# EAGLE board domino_IPB (EAGLE 9.6.2)
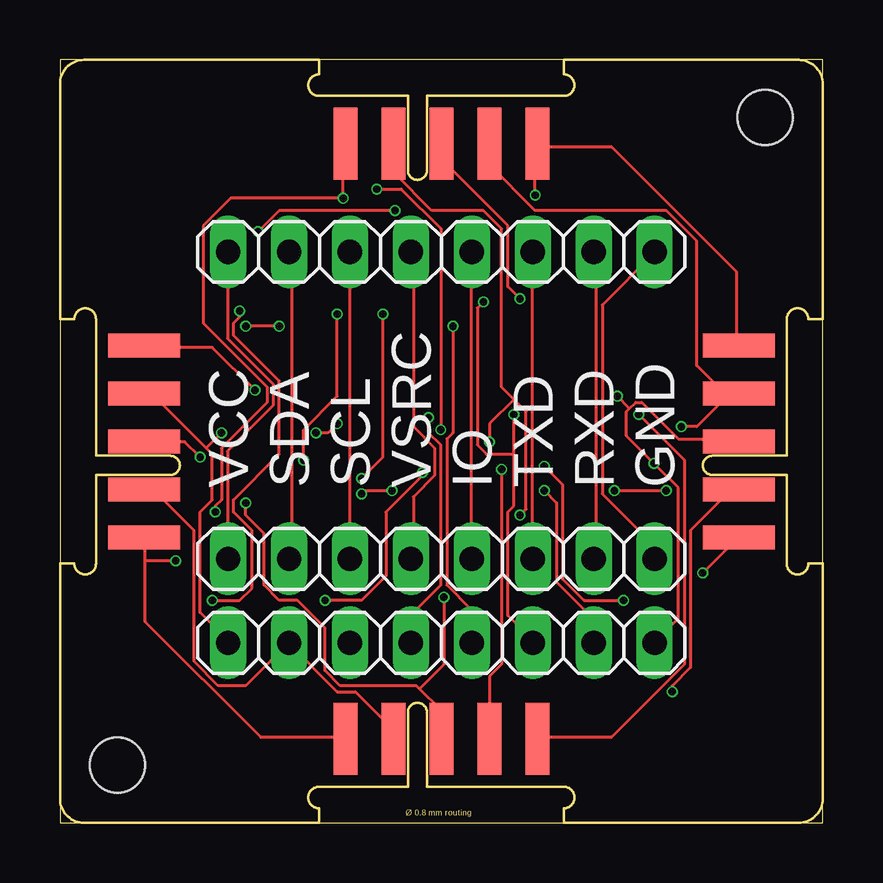
[diagram p0: board, top side]
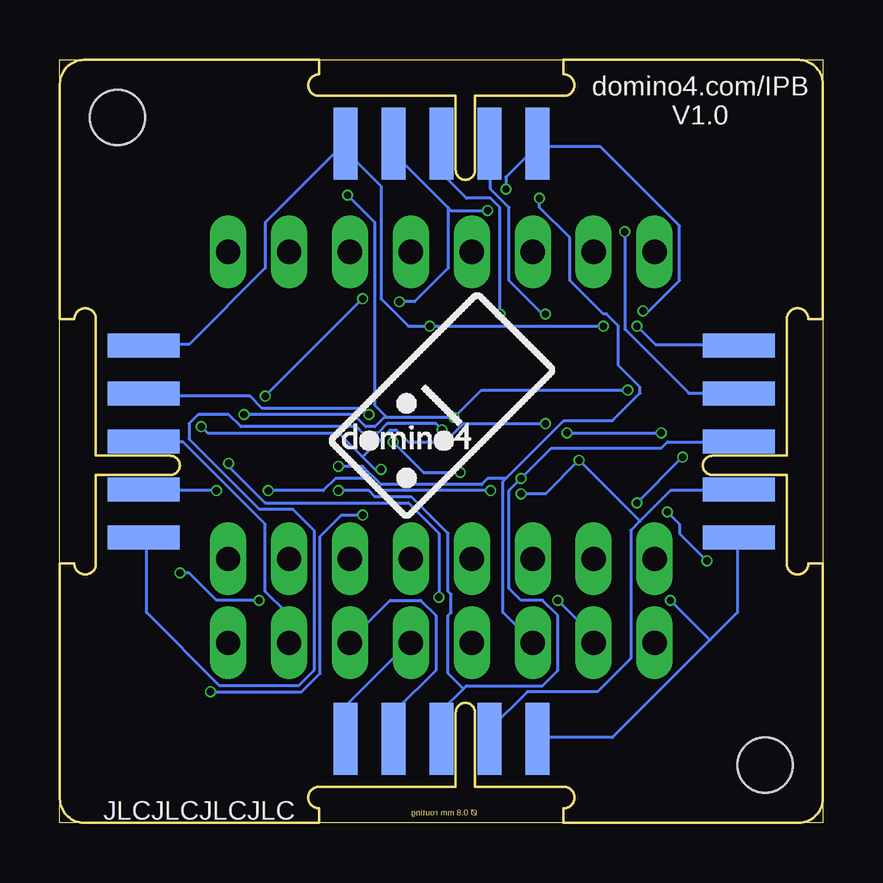
[diagram p1: board, bottom side, seen from below]

Size 31.8 x 31.8 mm. Coordinates in mm from the lower left corner, seen from the top.
Outline: 0,0 31.8,0 31.8,31.8 0,31.8 0,0
Copper layers (1*16): Top 0.035559375mm / dielectric 1.6mm / Bottom 0.035559375mm
Design rules "jlcpcb2layer": minimum track width 5mil, minimum drill 12mil, track to track 5mil, track to pad 5mil, pad to pad 5mil, via to via 5mil, smd to smd 5mil, copper to edge 8mil, drill to drill 6mil, minimum pad ring 5mil, minimum via ring 3mil, stop-mask expansion 2.5mil, vias tented up to drill 0mil, thermal gap 10mil

## Footprints (pad centres in the part's own frame; a part is rotated, then mirrored left to right if it is on the bottom)
1X08 = drill 1.016 long: 1 -8.89,0; 2 -6.35,0; 3 -3.81,0; 4 -1.27,0; 5 1.27,0; 6 3.81,0; 7 6.35,0; 8 8.89,0
XIX_2X2 = smd 3 x 1: GND@1 3.5,15.9; GND@3 28.3,15.9; SCL@1 3.5,11.9; SCL@3 28.3,11.9; SDA@1 3.5,13.9; SDA@3 28.3,13.9; VCC@1 3.5,17.9; VCC@3 28.3,17.9; VSRC@1 3.5,19.9; VSRC@3 28.3,19.9 | smd 1 x 3: GND@2 15.9,28.3; GND@4 15.9,3.5; SCL@2 11.9,28.3; SCL@4 11.9,3.5; SDA@2 13.9,28.3; SDA@4 13.9,3.5; VCC@2 17.9,28.3; VCC@4 17.9,3.5; VSRC@2 19.9,28.3; VSRC@4 19.9,3.5 | smd 3 x 1 bottom: PROG@5 3.5,13.9; PROG@7 28.3,13.9; RESET@5 3.5,11.9; RESET@7 28.3,11.9; RXD@5 3.5,15.9; RXD@7 28.3,15.9; TXD@5 3.5,17.9; TXD@7 28.3,17.9; VIN@5 3.5,19.9; VIN@7 28.3,19.9 | smd 1 x 3 bottom: PROG@6 13.9,28.3; PROG@8 13.9,3.5; RESET@6 11.9,28.3; RESET@8 11.9,3.5; RXD@6 15.9,28.3; RXD@8 15.9,3.5; TXD@6 17.9,28.3; TXD@8 17.9,3.5; VIN@6 19.9,28.3; VIN@8 19.9,3.5 | hole 2.3: 2.4,2.4; 29.4,29.4

## Placement (x,y rotation side)
JP1  [1X08]  15.9,7.5 0 top
JP2  [1X08]  15.9,11 0 top
JP3  [1X08]  15.9,23.8 0 top
U$1  DOMINO4_LOGOHALF  [DOMINO4_LOGO_HALF]  15.9,17.4 0 bottom
U$3  [JLCPCB-ORDER-NO]  26,0.52 0 bottom
XIX1  XIX_2X2STD  [XIX_2X2]  0,0 0 top

## Library data of the parts
JP1-JP3 = pinhead
U$1 = 24mm
U$3 = X15
XIX1 = XiX-xBUS-Rounded

## Nets
GND: JP1.8 XIX1.GND@1 XIX1.GND@2 XIX1.GND@3 XIX1.GND@4
N$1: JP2.1 JP3.1
N$2: JP2.2 JP3.2
N$3: JP2.3 JP3.3
N$4: JP2.4 JP3.4
N$5: JP2.5 JP3.5
N$6: JP2.6 JP3.6
N$7: JP2.7 JP3.7
N$8: JP2.8 JP3.8
PROG: XIX1.PROG@5 XIX1.PROG@6 XIX1.PROG@7 XIX1.PROG@8
RESET: XIX1.RESET@5 XIX1.RESET@6 XIX1.RESET@7 XIX1.RESET@8
RXD: JP1.7 XIX1.RXD@5 XIX1.RXD@6 XIX1.RXD@7 XIX1.RXD@8
SCL: JP1.3 XIX1.SCL@1 XIX1.SCL@2 XIX1.SCL@3 XIX1.SCL@4
SDA: JP1.2 XIX1.SDA@1 XIX1.SDA@2 XIX1.SDA@3 XIX1.SDA@4
TXD: JP1.6 XIX1.TXD@5 XIX1.TXD@6 XIX1.TXD@7 XIX1.TXD@8
VCC: JP1.1 XIX1.VCC@1 XIX1.VCC@2 XIX1.VCC@3 XIX1.VCC@4
VIN: JP1.5 XIX1.VIN@5 XIX1.VIN@6 XIX1.VIN@7 XIX1.VIN@8
VSRC: JP1.4 XIX1.VSRC@1 XIX1.VSRC@2 XIX1.VSRC@3 XIX1.VSRC@4

## Tracks (layer width: path | path; a pad name or v marks a point on that pad's centre or on a via)
GND  (via drill 0.3)
  Top 0.127: v5.84,15.24 5.21,15.88 3.56,15.88 XIX1.GND@1 | v7.75,13.34 7.75,12.83 8.51,12.06 8.51,9.91 9.14,9.27 9.91,9.27 11.05,8.13 11.05,6.35 11.68,5.71 14.86,5.71 14.99,5.59 | 14.99,5.59 15.88,4.7 15.88,3.56 XIX1.GND@4 | 23.75,17.27 23.62,17.14 23.62,16.13 v24.77,14.99 25.78,13.97 25.78,8.51 24.89,7.62 JP1.8 | 23.75,17.27 24,17.53 24.26,17.53 25.78,16 28.19,16 XIX1.GND@3 | v19.18,21.84 18.67,22.35 18.67,24.89 16,27.56 16,28.19 XIX1.GND@2 | 23.75,17.27 v23.24,17.78 | 14.99,5.59 16,6.6 v16,9.4
  Bottom 0.127: v7.75,13.34 v5.84,15.24 | v23.24,17.78 v19.18,21.84 | v16,9.4 16,12.06 17.27,13.34 23.24,13.34 24.77,14.86 v24.77,14.99
N$1
  Top 0.127: JP2.1 6.99,11.05 6.99,15.49 8.89,17.4 8.89,18.29 6.99,20.19 6.99,23.75 JP3.1
N$2
  Top 0.127: JP2.2 9.65,11.05 9.65,23.75 JP3.2
N$3
  Top 0.127: JP2.3 12.06,11.05 12.06,23.75 JP3.3
N$4
  Top 0.127: JP2.4 14.73,11.05 14.73,13.59 15.62,14.48 15.62,15.62 14.73,16.51 14.73,23.75 JP3.4
N$5
  Top 0.127: JP2.5 17.14,11.05 17.14,23.75 JP3.5
N$6
  Top 0.127: JP2.6 19.68,11.05 19.68,23.75 JP3.6
N$7
  Top 0.127: JP2.7 22.35,11.05 22.35,23.75 JP3.7
N$8
  Top 0.127: JP2.8 24.77,11.05 24.77,11.56 22.61,13.72 22.61,21.59 24.77,23.75 JP3.8
PROG  (via drill 0.3)
  Top 0.127: v11.56,21.21 11.56,17.78 10.16,16.38 v10.16,15.11 | v23.11,13.84 v25.27,13.84 | v13.84,13.84 12.7,13.84 v12.57,13.72
  Bottom 0.127: 7.62,12.57 6.35,13.84 3.56,13.84 XIX1.PROG@5 | 7.62,12.57 8,12.19 8,6.86 9.4,5.46 12.32,5.46 13.84,3.94 13.84,3.56 XIX1.PROG@8 | v11.56,21.21 11.68,21.21 13.08,22.61 13.08,25.65 13.84,26.42 13.84,28.19 XIX1.PROG@6 | 7.62,12.57 v10.16,15.11 11.56,13.72 v12.57,13.72 | v25.27,13.84 28.19,13.84 XIX1.PROG@7 | v23.11,13.84 20.83,13.84 20.32,14.35 19.05,14.35 18.54,13.84 v13.84,13.84
RESET  (via drill 0.3)
  Top 0.127: v7.49,21.34 7.49,21.08 7.24,20.83 7.24,20.32 9.14,18.41 9.14,15.37 7.24,13.46 7.24,12.95 8,12.19 8,9.78 7.49,9.27 v6.35,9.27 | v15.88,16.38 15.88,24.77 14.22,26.42 v13.21,26.42
  Bottom 0.127: 4.7,7.62 3.56,8.76 3.56,11.81 XIX1.RESET@5 | 4.7,7.62 8.76,3.56 11.81,3.56 XIX1.RESET@8 | v7.49,21.34 7.24,21.34 5.97,22.61 5.97,24.89 9.27,28.19 11.81,28.19 XIX1.RESET@6 11.94,28.19 13.21,26.92 v13.21,26.42 | 4.7,7.62 v6.35,9.27 | v15.88,16.38 16.13,16.64 18.16,16.64 18.54,16.26 19.18,16.26 19.43,16.51 24.26,16.51 24.77,17.02 26.04,17.02 26.42,16.64 26.42,16 23.5,13.08 22.1,13.08 21.21,12.19 21.21,6.35 21.84,5.71 25.15,5.71 28.19,8.76 28.19,11.81 XIX1.RESET@7
RXD  (via drill 0.3)
  Top 0.127: v13.46,21.21 13.46,15.24 v12.57,14.35 | v20.19,13.84 20.7,13.34 20.7,10.03 22.23,8.51 22.23,7.62 JP1.7
  Bottom 0.127: XIX1.RXD@7 28.19,15.88 26.67,15.88 23.24,12.45 23.24,9.65 22.35,8.76 22.35,7.62 JP1.7 | 14.99,5.59 15.88,4.7 15.88,3.56 XIX1.RXD@8 | 14.99,5.59 14.86,5.71 11.68,5.71 11.05,6.35 11.05,8.64 11.68,9.27 12.57,9.27 13.08,9.78 13.08,13.84 v12.57,14.35 11.3,15.62 6.73,15.62 6.48,15.88 3.56,15.88 XIX1.RXD@5 | v13.46,21.21 13.46,25.65 13.84,26.04 14.86,26.04 15.88,27.05 15.88,28.19 XIX1.RXD@6 | v20.19,13.84 18.92,13.84 18.67,13.59 17.14,13.59 15.62,12.06 15.62,9.65 15.49,9.53 15.49,8.76 15.62,8.64 15.62,6.22 14.99,5.59
SCL  (via drill 0.3)
  Top 0.127: 3.56,10.92 3.56,8.38 8.38,3.56 11.81,3.56 XIX1.SCL@4 | 3.56,10.92 3.56,11.81 XIX1.SCL@1 | XIX1.SCL@2 11.81,28.19 v11.81,26.04 7.11,26.04 5.97,24.89 5.97,20.83 8.64,18.16 8.64,17.53 6.73,15.62 6.73,13.46 6.48,13.21 v6.48,12.95 | v26.8,10.41 28.19,11.81 XIX1.SCL@3 | v23.5,9.27 21.84,9.27 20.95,10.16 20.95,14.1 v20.19,14.86 | v4.83,10.92 3.56,10.92
  Bottom 0.127: v11.81,26.04 11.81,25.65 10.54,24.38 10.54,22.61 9.14,21.21 9.02,21.21 8.51,20.7 8.51,19.05 7.62,18.16 7.62,17.91 8.76,16.76 10.79,16.76 13.21,14.35 | 13.21,14.35 13.34,14.22 13.34,8.76 12.19,7.62 JP1.3 | v26.8,10.41 26.42,10.41 25.27,9.27 v23.5,9.27 | v20.19,14.86 19.18,14.86 18.41,14.1 14.22,14.1 13.97,14.35 13.21,14.35 | v4.83,10.92 5.97,12.06 5.97,12.45 v6.48,12.95
SDA  (via drill 0.3)
  Top 0.127: 9.53,7.49 11.56,5.46 12.32,5.46 13.84,3.94 13.84,3.56 XIX1.SDA@4 | 9.53,7.49 7.75,5.71 6.6,5.71 5.59,6.73 5.59,12.19 3.94,13.84 3.56,13.84 XIX1.SDA@1 | 9.53,7.49 JP1.2 | 18.92,17.65 19.43,17.14 19.43,13.08 v19.18,12.83 | 18.92,17.65 18.41,18.16 18.41,24.77 17.65,25.53 15.49,25.53 13.97,27.05 13.97,28.19 XIX1.SDA@2 | v25.53,5.46 25.53,5.71 26.29,6.48 26.29,12.19 27.94,13.84 28.19,13.84 XIX1.SDA@3 | v11.05,9.27 12.57,9.27 13.59,10.29 13.59,12.95 15.11,14.48 v15.11,14.61 | v17.91,15.88 17.91,16.64 18.92,17.65
  Bottom 0.127: v19.18,12.83 20.07,12.83 20.95,11.94 20.95,6.22 21.72,5.46 v25.53,5.46 | v11.05,9.27 9.65,7.87 9.65,7.62 JP1.2 | v15.11,14.61 16.64,14.61 v17.91,15.88
TXD  (via drill 0.3)
  Top 0.127: 18.92,15.37 18.92,13.21 18.67,12.95 18.67,8.64 19.68,7.62 JP1.6 | 18.92,15.37 v18.92,17.02 | v8.26,24.64 9.14,25.53 v13.97,25.53 | 18.92,15.37 17.78,15.37 17.4,15.75 17.4,21.46 v17.65,21.72
  Bottom 0.127: XIX1.TXD@8 17.78,3.56 17.78,4.7 16.13,6.35 16.13,8.64 16.76,9.27 18.03,9.27 19.68,7.62 JP1.6 | v18.92,17.02 19.18,17.27 23.37,17.27 23.88,17.78 28.19,17.78 XIX1.TXD@7 | v8.26,24.64 8.26,20.57 5.59,17.91 3.56,17.91 XIX1.TXD@5 | v13.97,25.53 15.49,25.53 15.62,25.65 | 15.62,25.65 17.78,27.81 17.78,28.19 XIX1.TXD@6 | v17.65,21.72 17.02,21.72 15.62,23.11 15.62,25.65
VCC  (via drill 0.3)
  Top 0.127: 6.1,15.62 6.35,15.37 6.35,13.46 5.84,12.95 5.84,8.76 6.99,7.62 JP1.1 | 6.1,15.62 3.94,17.78 3.56,17.78 XIX1.VCC@1 | v18.41,14.73 18.41,6.6 17.91,6.1 17.91,3.56 XIX1.VCC@4 | v25.91,16.51 26.54,16.51 27.81,17.78 | 27.81,17.78 28.19,17.78 XIX1.VCC@3 27.81,17.78 | 27.81,17.78 26.54,19.05 26.54,24.26 25.27,25.53 19.81,25.53 17.91,27.43 17.91,28.19 XIX1.VCC@2 | v6.73,16.26 6.1,15.62 | v10.67,16.26 11.18,16.26 v11.56,16.64
  Bottom 0.127: v18.41,14.73 18.67,14.73 19.18,15.24 | 19.18,15.24 20.19,16.26 25.65,16.26 v25.91,16.51 | v10.67,16.26 v6.73,16.26 | v11.56,16.64 14.99,16.64 15.75,15.88 17.27,15.88 17.78,16.38 18.03,16.38 19.18,15.24
VIN  (via drill 0.3)
  Top 0.127: v9.14,20.7 v7.75,20.7 | v16.38,20.7 16.38,16.26 16.13,16 16.13,9.91 17.14,8.89 17.14,7.62 JP1.5
  Bottom 0.127: XIX1.VIN@8 19.81,3.56 19.81,4.95 17.27,7.49 JP1.5 | v7.75,20.7 6.99,19.94 3.56,19.94 XIX1.VIN@5 | v9.14,20.7 v16.38,20.7 17.27,20.7 18.41,21.84 18.41,26.54 19.81,27.94 19.81,28.19 XIX1.VIN@6 19.94,28.32 23.24,25.02 23.24,23.11 26.42,19.94 28.19,19.94 XIX1.VIN@7
VSRC  (via drill 0.3)
  Top 0.127: XIX1.VSRC@3 28.19,19.94 28.19,22.99 22.99,28.19 19.94,28.19 XIX1.VSRC@2 19.81,28.19 v19.81,26.16 | v8.13,18.03 6.35,19.81 3.56,19.81 XIX1.VSRC@1 | v15.37,16.89 15.37,16.26 15.88,15.75 15.88,9.91 14.73,8.76 14.73,7.62 JP1.4 | v24.13,17.02 26.04,15.11 26.04,6.6 22.99,3.56 19.94,3.56 XIX1.VSRC@4
  Bottom 0.127: v8.13,18.03 14.22,18.03 v15.37,16.89 18.16,16.89 | v24.13,17.02 19.56,17.02 19.05,16.51 18.67,16.51 18.29,16.89 18.16,16.89 | v19.81,26.16 18.67,25.02 18.67,17.4 18.16,16.89

## Text on the board
tPlace: VCC | SDA | SCL | VSRC | IO | TXD | RXD | GND
bPlace: domino4.com/IPB / V1.0